# EAGLE board mezza (EAGLE 9.5.2)

Size 85 x 54 mm. Coordinates in mm from the lower left corner, seen from the top.
Copper layers (1*16): Top 0.035mm / dielectric 1.5mm / Bottom 0.035mm
Design rules "default *": minimum track width 10mil, minimum drill 24mil, track to track 8mil, track to pad 8mil, pad to pad 8mil, via to via 8mil, smd to smd 8mil, copper to edge 20mil, drill to drill 8mil, minimum pad ring 10mil, minimum via ring 8mil, stop-mask expansion 4mil, vias tented up to drill 0mil, thermal gap 10mil
bKeepout: area 16,0 to 34,11; area 48,0 to 85,15.7; area 68,40.2 to 78.7,54

## Footprints (pad centres in the part's own frame; a part is rotated, then mirrored left to right if it is on the bottom)
57202-G52-20LF = smd 1 x 2.5: P$1 -19,2; P$2 -19,-2; P$3 -17,2; P$4 -17,-2; P$5 -15,2; P$6 -15,-2; P$7 -13,2; P$8 -13,-2; P$9 -11,2; P$10 -11,-2; P$11 -9,2; P$12 -9,-2; P$13 -7,2; P$14 -7,-2; P$15 -5,2; P$16 -5,-2; P$17 -3,2; P$18 -3,-2; P$19 -1,2; P$20 -1,-2; P$21 1,2; P$22 1,-2; P$23 3,2; P$24 3,-2; P$25 5,2; P$26 5,-2; P$27 7,2; P$28 7,-2; P$29 9,2; P$30 9,-2; P$31 11,2; P$32 11,-2; P$33 13,2; P$34 13,-2; P$35 15,2; P$36 15,-2; P$37 17,2; P$38 17,-2; P$39 19,2; P$40 19,-2
61083-063402LF = smd 0.5 x 2: P$1 -11.6,2.2; P$2 -11.6,-2.2; P$3 -10.8,2.2; P$4 -10.8,-2.2; P$5 -10,2.2; P$6 -10,-2.2; P$7 -9.2,2.2; P$8 -9.2,-2.2; P$9 -8.4,2.2; P$10 -8.4,-2.2; P$11 -7.6,2.2; P$12 -7.6,-2.2; P$13 -6.8,2.2; P$14 -6.8,-2.2; P$15 -6,2.2; P$16 -6,-2.2; P$17 -5.2,2.2; P$18 -5.2,-2.2; P$19 -4.4,2.2; P$20 -4.4,-2.2; P$21 -3.6,2.2; P$22 -3.6,-2.2; P$23 -2.8,2.2; P$24 -2.8,-2.2; P$25 -2,2.2; P$26 -2,-2.2; P$27 -1.2,2.2; P$28 -1.2,-2.2; P$29 -0.4,2.2; P$30 -0.4,-2.2; P$31 0.4,2.2; P$32 0.4,-2.2; P$33 1.2,2.2; P$34 1.2,-2.2; P$35 2,2.2; P$36 2,-2.2; P$37 2.8,2.2; P$38 2.8,-2.2; P$39 3.6,2.2; P$40 3.6,-2.2; P$41 4.4,2.2; P$42 4.4,-2.2; P$43 5.2,2.2; P$44 5.2,-2.2; P$45 6,2.2; P$46 6,-2.2; P$47 6.8,2.2; P$48 6.8,-2.2; P$49 7.6,2.2; P$50 7.6,-2.2; P$51 8.4,2.2; P$52 8.4,-2.2; P$53 9.2,2.2; P$54 9.2,-2.2; P$55 10,2.2; P$56 10,-2.2; P$57 10.8,2.2; P$58 10.8,-2.2; P$59 11.6,2.2; P$60 11.6,-2.2 | hole 1.2: 14.1,0 | hole 0.8: -14.1,0
DRAGONBOARD410C = drill 2.5: G$1 4,18.5; G$2 81,18.5; G$3 81,50; G$4 4,50

## Placement (x,y rotation side)
J1  57202-G52-20LF  [57202-G52-20LF]  29,50 180 bottom
J2  61083-063402LF  [61083-063402LF]  32.75,15.45 180 bottom
PCB1  DB410C-PCB-FOOTPRINT  [DRAGONBOARD410C]  0,0 0 top

## Library data of the parts
J1 J2 PCB1 = mezza

## Nets
+1V8: J1.P$35
+5V: J1.P$37
CLK0/CSI0_MCLK: J2.P$15
CLK1/CSI1_MCLK: J2.P$17
CSI0_C+: J2.P$2
CSI0_C-: J2.P$4
CSI0_D0+: J2.P$8
CSI0_D0-: J2.P$10
CSI0_D1+: J2.P$14
CSI0_D1-: J2.P$16
CSI0_D2+: J2.P$20
CSI0_D2-: J2.P$22
CSI0_D3+: J2.P$26
CSI0_D3-: J2.P$28
CSI1_C+: J2.P$54
CSI1_C-: J2.P$56
CSI1_D0+: J2.P$42
CSI1_D0-: J2.P$44
CSI1_D1+: J2.P$48
CSI1_D1-: J2.P$50
DSI_CLK+: J2.P$21
DSI_CLK-: J2.P$23
DSI_D0+: J2.P$27
DSI_D0-: J2.P$29
DSI_D1+: J2.P$33
DSI_D1-: J2.P$35
DSI_D2+: J2.P$39
DSI_D2-: J2.P$41
DSI_D3+: J2.P$45
DSI_D3-: J2.P$47
GND: J1.P$1 J1.P$2 J1.P$39 J1.P$40 J2.P$6 J2.P$12 J2.P$13 J2.P$18 J2.P$19 J2.P$24 J2.P$25 J2.P$30 J2.P$31 J2.P$37 J2.P$40 J2.P$43 J2.P$46 J2.P$49 J2.P$52 J2.P$55 J2.P$58 PCB1.G$1 PCB1.G$2 PCB1.G$3 PCB1.G$4
GPIO-A: J1.P$23
GPIO-B: J1.P$24
GPIO-C: J1.P$25
GPIO-D: J1.P$26
GPIO-E: J1.P$27
GPIO-F: J1.P$28
GPIO-G: J1.P$29
GPIO-H: J1.P$30
GPIO-I: J1.P$31
GPIO-J: J1.P$32
GPIO-K: J1.P$33
GPIO-L: J1.P$34
HSIC_DATA: J2.P$59
HSIC_STR: J2.P$57
I2C0_SCL: J1.P$15
I2C0_SDA: J1.P$17
I2C1_SCL: J1.P$19
I2C1_SDA: J1.P$21
I2C2_SCL: J2.P$32
I2C2_SDA: J2.P$34
I2C3_SCL: J2.P$36
I2C3_SDA: J2.P$38
PCM_CLK: J1.P$18
PCM_DI: J1.P$22
PCM_DO: J1.P$20
PCM_FS: J1.P$16
PWR_BTN_N: J1.P$4
RESERVED: J2.P$60
RST_BTN_N: J1.P$6
SD_CMD/SPI1_DIN: J2.P$11
SD_DAT0/SPI1_DOUT: J2.P$1
SD_DAT1: J2.P$3
SD_DAT2: J2.P$5
SD_DAT3/SPI1_CS: J2.P$7
SD_SCLK/SPI1_SCLK: J2.P$9
SPI0_CS: J1.P$12
SPI0_DIN: J1.P$10
SPI0_DOUT: J1.P$14
SPI0_SCLK: J1.P$8
SYS_DCIN: J1.P$36 J1.P$38
UART0_CTS: J1.P$3
UART0_RTS: J1.P$9
UART0_RXD: J1.P$7
UART0_TXD: J1.P$5
UART1_RXD: J1.P$13
UART1_TXD: J1.P$11
USB_D+: J2.P$51
USB_D-: J2.P$53

## Tracks (layer width: path | path; a pad name or v marks a point on that pad's centre or on a via)
GND  (24 unrouted)
SYS_DCIN  (1 unrouted)

## Text on the board
tNames: Mezzanine Template
bNames: Mezzanine Template